# Altium PCB MSOP-8_L3.0-W3.0-P0.65-LS4.9-BL_2020-12-23_22-11-52.pcbdoc
Units mil, origin at the board's own origin, x right, y up, seen from the top; angles counter-clockwise.
Board outline 1291.53 x 1262 mil, 2 copper layers (Top Layer, Bottom Layer); 1 components, 0 nets, 8 pads, 0 vias.
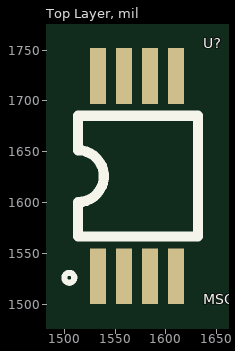
[diagram p0: Top Layer view]
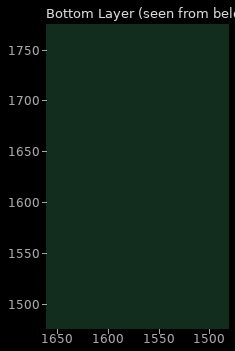
[diagram p1: Bottom Layer view, seen from below]

## Layer stack, top to bottom
Top Layer: signal copper (thickness not stored)
Dielectric: dielectric 12.6, FR-4, Dk 4.8
Bottom Layer: signal copper (thickness not stored)

## Board outline
2291.53,1000 1000,1000 1000,2262 2291.53,2262

## Components (designator, comment, footprint, x,y, rotation, side; value= is the part's Value field where it differs from the comment)
U? "MSOP-8_L3.0-W3.0-P0.65-LS4.9-BL" MSOP-8_L3.0-W3.0-P0.65-LS4.9-BL 1568.27,1626 r0 top

## Footprints (in the part's own frame and the unit in brackets; to place one, negate y for a bottom-side part, rotate by r counter-clockwise, add the part's x,y. Pads: shape width x height; smd on the part's side, far side on the other; paste and mask are expansions set on the pad)
MSOP-8_L3.0-W3.0-P0.65-LS4.9-BL [mil]
  rect 16x55 smd: 1(-35.03,-98.5) 2(-9.44,-98.5) 3(16.16,-98.5) 4(41.75,-98.5) 5(41.75,98.5) 6(16.16,98.5) 7(-9.44,98.5) 8(-35.03,98.5)
  silkscreen extent -68,-105 63,59

## Nets (pads, with @x,y where several pads share a name; then routed paths per layer and width w, separated by ;. In a path a pad name is that pad's centre, name@x,y a point inside that pad or via, vN(x,y) a via of type N, cw(c..) or ccw(c..) an arc to the next point about the centre after c; other vN are vias at no path point)
pads on no net: U?.1 U?.2 U?.3 U?.4 U?.5 U?.6 U?.7 U?.8

## Silkscreen, mask and mechanical layers (free items; w line width, h text height)
Document:
  lines w0.1: 1644.77,1630 1646.77,1632